# Altium PCB 14V2A.PcbDoc
Units mil, origin at the board's own origin, x right, y up, seen from the top; angles counter-clockwise.
Board outline 3300 x 1500 mil, 2 copper layers (TopLayer, BottomLayer); 52 components, 34 nets, 130 pads, 4 vias.
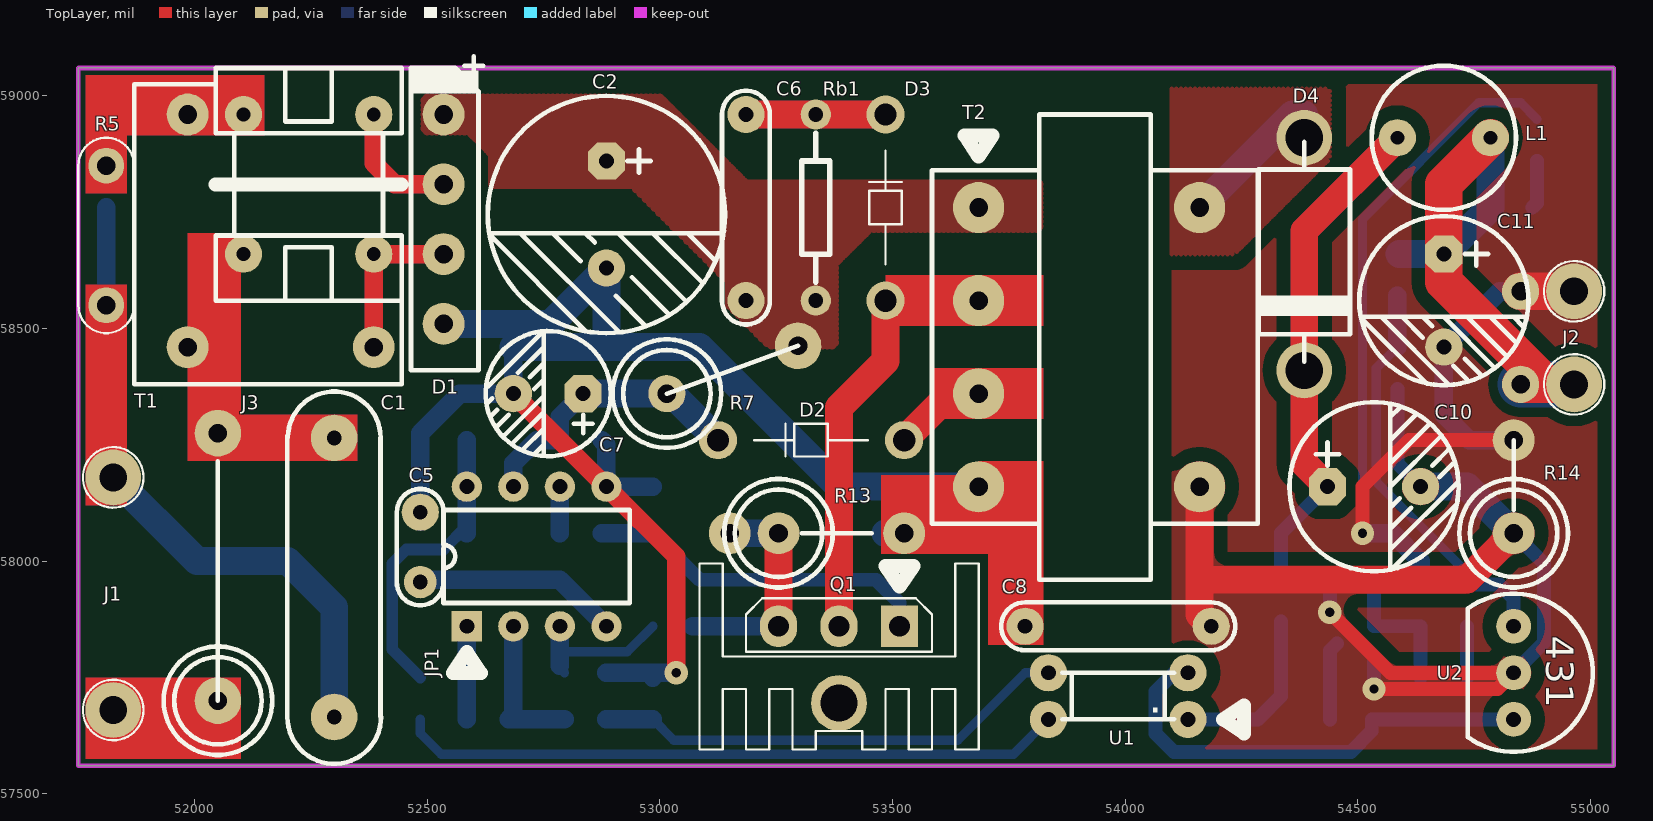
[diagram p0: TopLayer view]
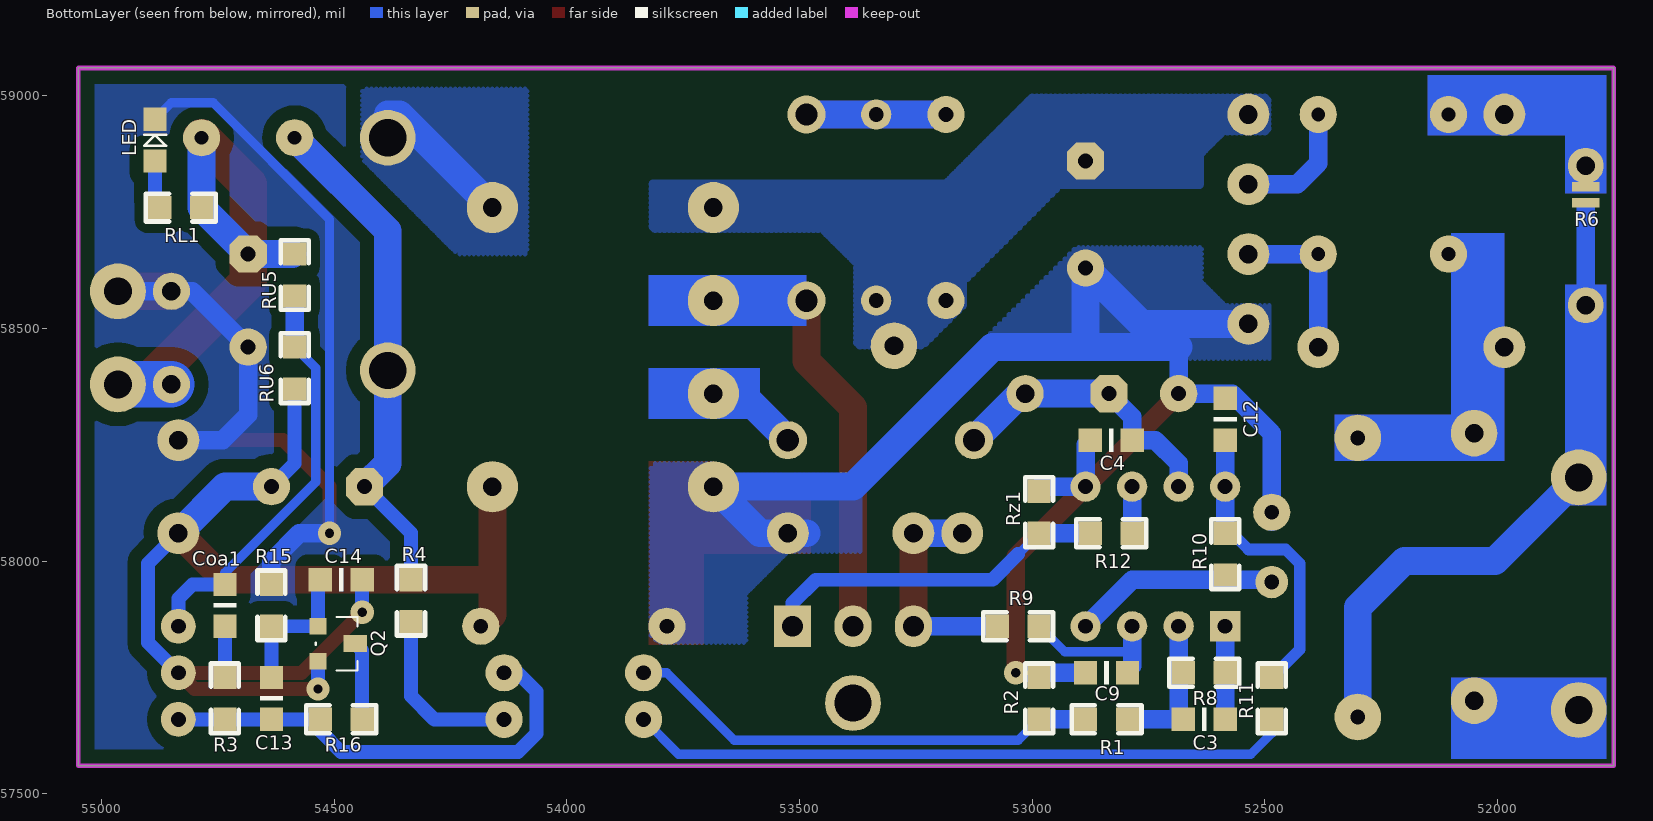
[diagram p1: BottomLayer view, seen from below]

## Layer stack, top to bottom
TopSolder: solder mask 0.4, Solder Resist, Dk 3.5
TopLayer: signal copper 1.4
Dielectric1: dielectric 12.6, FR-4, Dk 4.8
BottomLayer: signal copper 1.4
BottomSolder: solder mask 0.4, Solder Resist, Dk 3.5

## Board outline
51750,57560 55050,57560 55050,59060 51750,59060

## Design rules (kind name [scope] priority, off if disabled: settings)
Clearance Clearance_1 [All vs HasFootprint('XPAD')] p1: gap=2 ignorepadtopadclearanceinfootprint=FALSE except(0: Arc-Hole Track-Hole SMDPad-Hole THPad-Hole Via-Hole Fill-Hole Poly-Hole Region-Hole Text-Hole)
Clearance Clearance_2 [All vs (InPoly)] p2: gap=30 ignorepadtopadclearanceinfootprint=FALSE except(0: Arc-Hole Track-Hole SMDPad-Hole THPad-Hole Via-Hole Fill-Hole Poly-Hole Region-Hole Text-Hole)
Clearance [All] p3: gap=10 ignorepadtopadclearanceinfootprint=FALSE except(0: Arc-Hole Track-Hole SMDPad-Hole THPad-Hole Via-Hole Fill-Hole Poly-Hole Region-Hole Text-Hole)
ComponentClearance [All] p1 off: gap=10 collisioncheckmode=3 verticalgap=10 showdistances=FALSE
FabricationTestPointUsage TestPointUsage [All] p1: valid=0 allowmultiple=FALSE
FabricationTestpoint Testpoint [All] p1: side=3 testpointundercomponent=TRUE minsize=40 maxsize=100 preferedsize=60 minholesize=20 maxholesize=40 preferedholesize=32 testpointgrid=1 allowsidetop=TRUE allowsidebottom=TRUE usegrid=TRUE gridtolerance=0.01
HoleSize [All] p1: absolutevalues=TRUE maxlimit=1000 minlimit=1 maxpercent=80.000 minpercent=20.000
PolygonConnect [All] p1: connectstyle=Direct reliefconductorwidth=10 reliefentries=4 polygonreliefangle="90 Angle" airgapwidth=10
RoutingVias [All] p1: holewidth=28 width=50 viastyle="Through Hole" minholewidth=28 minwidth=50 maxholewidth=28 maxwidth=50
SolderMaskExpansion SolderMaskExpansion_1 [HasFootprint('XPAD')] p1: expansion=0
SolderMaskExpansion [All] p2: expansion=4
Width [All] p1: maxlimit=100 minlimit=5 preferedwidth=100
26 further rules are at their usual default settings.

## Components (designator, comment, footprint, x,y, rotation, side; value= is the part's Value field where it differs from the comment)
C1 "Tụ điện chân cắm 275VAC X2 104" 100N400V 52300,58265 r270 top
C2 "Tụ hóa chân cắm 22uF/400V" 1000U50V 52885,58860 r270 top
C3 "Tụ điện dán 0805 100p" 0805C 52585,57660 r0 bottom
C4 "Tụ điện dán 0805 104" 0805C 52785,58260 r0 bottom
C5 "Tụ điện chân cắm 472" 104NHO 52485,58105 r270 top
C6 "Tụ điện chân cắm 103/2kV" 10N1000V 53185,58960 r90 top
C7 "Tụ hóa chân cắm 47uF/50V" 10U50V 52835,58360 r180 top
C8 "Tụ điện chân cắm 471/2kV" 10N1000V 53785,57860 r180 top
C9 "Tụ điện dán 0805 102" 0805C 52795,57760 r0 bottom
C10 "Tụ hóa chân cắm 1000uF25V" 1000U16V 54435,58160 r0 top
C11 "Tụ hóa chân cắm 470uF/25V" 1000U16V 54685,58660 r270 top
C12 "Tụ điện dán 0805 104" 0805C 52585,58260 r90 bottom
C13 "Tụ điện dán 0805 104" 0805C 54635,57750 r270 bottom
C14 "Tụ điện dán 0805 104" 0805C 54530,57960 r180 bottom
Coa1 "Tụ điện dán 0805 104" 0805C 54735,57860 r90 bottom
D1 "Cầu chỉnh lưu Diode dẹt, chân cắm 2A" CAU2A 52535,58960 r270 top
D2 "Diode xung chân cắm 2A FR207" DIODE1A 53525,58260 r180 top
D3 "Diode xung chân cắm 2A FR207" DIODE1A 53485,58560 r90 top
D4 "Diode xung chân cắm 3A FR307" 1N5408 54385,58960 r270 top
J1 "Jump đực loại thẳng, 2.54mm 2P" JACK2_NAM#1 51825,57980 r180 top
J2 "Jump đực loại thẳng, 2.54mm 2P" JACK2_NAM#2 54965,58380 r180 top
J3 "Cầu chì 1A/275V" R2W_DUNG#1 52050,57700 r270 top
JP1 "IC điều khiển nguồn AC-DC KA3843" DIP8 52585,57860 r90 top
L1 "Cuộn cảm chân cắm lõi trụ 10uH/2A" 330UH 54585,58910 r0 top
LED "LED dán 0805 GREEN" LED0805 54885,58860 r90 bottom
Q1 "Transistor trường MOSFET N, chân cắm TO-220 7N60B" TO220TNB 53485,57860 r180 top
Q2 "Transistor BJT NPN, chân dán SOT-23 2N3904" SOT23S 54535,57785 r180 bottom
R1 "Điện trở dán 0805 10K" 0805DD 52885,57660 r180 bottom
R2 "Điện trở dán 0805 2K2" 0805DD 52985,57660 r90 bottom
R3 "Điện trở dán 0805 470R" 0805DD 54735,57750 r270 bottom
R4 "Điện trở dán 0805 2K2" 0805DD 54335,57870 r90 bottom
R5 "Nhiệt điện trở âm NTC 5D11" CSIP4 51810,58550 r90 top
R6 "OPTION JUMP" XPAD 51810,58770 r90 bottom
R7 "Điện trở chân cắm 2W 220K" R2W_DUNG#2 53015,58360 r200 top
R8 "Điện trở dán 0805 150K" 0805DD 52585,57760 r0 bottom
R9 "Điện trở dán 0805 1K" 0805DD 52985,57860 r0 bottom
R10 "Điện trở dán 0805 3K3" 0805DD 52585,58060 r270 bottom
R11 "Điện trở dán 0805 1K" 0805DD 52485,57750 r270 bottom
R12 "Điện trở dán 0805 22R" 0805DD 52785,58060 r0 bottom
R13 "Điện trở chân cắm 2W 1R0" R2WDUNG#1 53255,58060 r270 top
R14 "Điện trở chân cắm 2W 0R47" R2WDUNG#2 54835,58060 r0 top
R15 "Điện trở dán 0805 10K" 0805DD 54635,57860 r90 bottom
R16 "Điện trở dán 0805 2K2" 0805DD 54440,57660 r0 bottom
Rb1 "Điện trở chân cắm 1W 68K" AXIAL0.4 53335,58960 r270 top
RL1 "Điện trở dán 0805 2K2" 0805DD 54785,58760 r0 bottom (schematic designator Rl1)
RU5 "Điện trở dán 0805 5K6" 0805DD 54585,58660 r270 bottom
RU6 "Điện trở dán 0805 1K" 0805DD 54585,58460 r270 bottom
Rz1 "Điện trở dán 0805 10K" 0805DD 52985,58060 r90 bottom
T1 "Cuộn cảm lọc đầu vào EMI Filter 10-20mH/2A" EMI_FILTER 52105,58660 r0 top
T2 "Biến áp xung Flyback" TRANS6C 53685,58760 r0 top
U1 "Cách ly quang chân cắm TLP521-1" TLP521_1 54135,57660 r0 top
U2 "IC điện áp chuẩn, chân cắm TO92 TL431" TO92_431 54835,57860 r270 top

## Footprints (in the part's own frame and the unit in brackets; to place one, negate y for a bottom-side part, rotate by r counter-clockwise, add the part's x,y. Pads: shape width x height; smd on the part's side, far side on the other; paste and mask are expansions set on the pad)
1N5408 [mil]
  round 120 hole 80: 1(50,0) 2(550,0)
  silkscreen extent 59,-98 531,98, body extent 28,-100 575,98, height 229
10N1000V [mil]
  round 80 hole 32: 1(0,0) 2(-400,0)
  silkscreen extent -451,-51 51,51, body extent -305,-49 -89,49, height 236
10U50V [mil]
  oct 80x80 hole 32: 1(0,0)
  round 80 hole 32: 2(150,0)
  silkscreen extent -60,-134 209,134
100N400V [mil]
  round 100 hole 32: 1(0,0) 2(600,0)
  silkscreen extent -99,-101 700,101, body extent -73,-157 675,158, height 650
104NHO [mil]
  round 80 hole 32: 1(0,0)
  round 70 hole 32: 2(150,0)
  silkscreen extent -50,-50 200,50, body extent -63,-33 213,33, height 288
330UH [mil]
  round 80 hole 30: 1(0,0) 2(200,0)
  silkscreen extent -55,-155 255,155, body extent -98,-196 295,198, height 537
0805C [mil]
  rect 50x50 smd: 1(0,0) 2(90,0)
  silkscreen extent 40,-25 50,25, body extent 6,-25 84,25, height 31
0805DD [mil]
  rect 50x50 smd: 1(0,0) 2(90,0)
  silkscreen extent -30,-30 120,30, body extent 4,-25 82,25, height 31
1000U16V [mil]
  oct 80x80 hole 32: 1(0,0)
  round 80 hole 32: 2(200,0)
  silkscreen extent -82,-182 282,182, body extent -97,-197 297,197, height 473
1000U50V [mil]
  oct 80x80 hole 32: 1(0,0)
  round 80 hole 32: 2(230,0)
  silkscreen extent -140,-255 370,255, body extent -83,-197 311,197, height 473
AXIAL0.4 [mil]
  round 65 hole 32: 1(0,0) 2(400,0)
  silkscreen extent 40,-30 360,30, body extent -12,-69 410,69, height 159
CAU2A [mil]
  round 90 hole 40: 1(0,0) 2(150,0) 3(300,0) 4(450,0)
  silkscreen extent -125,-70 550,85, body extent -62,-89 512,108, height 453
CSIP4 [mil]
  round 77 hole 40: 1(0,0) 2(300,0)
  silkscreen extent -60,-60 360,60, body extent -7,-47 308,47, height 370
DIODE1A [mil]
  round 82 hole 48: 1(0,0) 2(400,0)
  silkscreen extent 78,-35 322,35, body extent -15,-51 415,50, height 120
DIP8 [mil]
  rect 65x65 hole 32: 1(0,0)
  round 65 hole 32: 2(0,-100) 3(0,-200) 4(0,-300) 5(300,-300) 6(300,-200) 7(300,-100) 8(300,0)
  silkscreen extent 50,-350 250,50
EMI_FILTER [mil]
  round 80 hole 30: 1(0,0) 2(0,300) 3(280,0) 4(280,300)
  silkscreen extent -60,-100 340,400
JACK2_NAM#1 [mil]
  round 120 hole 60: 1(0,300) 2(0,-200)
JACK2_NAM#2 [mil]
  round 120 hole 60: 1(0,0) 2(0,-200)
LED0805 [mil]
  rect 50x50 smd: 1(0,0) 2(90,0)
  silkscreen extent 32,-24 56,24, body extent 5,-25 85,24, height 43
R2W_DUNG#1 [mil]
  round 100 hole 40: 1(0,0) 2(-575,0)
  silkscreen extent -515,-117 117,117
R2W_DUNG#2 [mil]
  round 80 hole 40: 1(0,0)
  round 100 hole 40: 2(-300,0)
  silkscreen extent -300,-117 117,117
R2WDUNG#1 [mil]
  round 90 hole 40: 1(0,0) 2(0,270)
  silkscreen extent -117,-117 117,200
R2WDUNG#2 [mil]
  round 90 hole 40: 1(0,0) 2(0,200)
  silkscreen extent -117,-117 117,200
SOT23S [mil]
  rect 36x36 smd: 1(0,75) 3(0,0)
  rect 50x36 smd: 2(80,38)
  silkscreen extent -5,-20 85,95, body extent -9,-21 89,97, height 44
TLP521_1 [mil]
  round 80 hole 32: 1(0,0) 2(0,100) 3(-300,100) 4(-300,0)
  silkscreen extent -270,0 -30,100, body extent -305,-40 5,140, height 138
TO92_431 [mil]
  round 75 hole 32: 1(0,0) 2(100,0) 3(200,0)
  silkscreen extent -70,-99 270,170
TO220TNB [mil]
  round 120 hole 78.74: 0(100,165)
  rect 80x90 hole 45: 1(-30,0)
  oval 80x90 hole 45: 2(100,0) 3(230,0)
  silkscreen extent -200,-135 400,265, body extent -195,-150 395,283, height 1182
TRANS6C [mil]
  round 110 hole 40: 1(0,0) 2(0,-200) 3(0,-400) 4(0,-600) 5(475,-600) 6(475,0)
  silkscreen extent -100,-800 600,200
XPAD [mil]
  rect 20x60 smd: 1(0,0) 2(35,0)

## Part data
C1 C3 C4 C5 C6 C8 C9 C12 C13 C14 Coa1: library part CAP
C2 C7 C10 C11: library part "Cap Pol1", "Polarized Capacitor (Radial)"
D1: library part BRIDGE1, "Diode Bridge"
D2 D3 D4: library part DIODE
J1 J2: library part CON2
J3: library part FUSE2, "Fuse"
JP1: library part "HEADER 4X2"
L1: library part INDUCTORSMALL
LED: library part LED0, "Typical INFRARED GaAs LED"
Q1: library part "MOSFET N"
Q2: library part NPN, "NPN Bipolar Transistor"
R1 R2 R3 R4 R7 R8 R9 R10 R11 R12 R13 R14 R15 R16 Rb1 RL1 RU5 RU6 Rz1: library part "Res Semi", "Semiconductor Resistor"
R5 R6: library part RES3
T1: library part TRANS1
T2: library part TRANS6
U1: library part OPTOISO1, "Optoisolator"
U2: library part TL431, "Adjustable Precision Shunt Regulator"

## Free pads (board coordinates)
  round 90 hole 40: 0(51985,58960) 0(53150,58060) 3(52385,58460) 4(51985,58460)
  round 80 hole 40: 0(54850,58380) 1(54850,58580)

## Via types
v1: diameter 50, hole 20, TopLayer to BottomLayer, 4 vias

## Nets (pads, with @x,y where several pads share a name; then routed paths per layer and width w, separated by ;. In a path a pad name is that pad's centre, name@x,y a point inside that pad or via, vN(x,y) a via of type N, cw(c..) or ccw(c..) an arc to the next point about the centre after c; other vN are vias at no path point)
+320: C2.1 C6.2 D1.1 R7.2 Rb1.2 T2.1
EARTH: C8.2 C10.2 C14.2 Q2.3 R14.1 RU6.2 T2.5 U2.2 | length 2746.1
  TopLayer w30: v1(54440,57890) 54570,57760 U2.2 54800,57725 v1(54535,57725)
  TopLayer w60: T2.5 54160,57960 ; C8.2 54160,57885 54160,57960 ; R14.1 54735,57960 54160,57960
  BottomLayer w30: v1(54440,57890) C14.2 ; v1(54535,57725) Q2.3 ; RU6.2 54585,58210 C10.2 ; U2.2 54900,57825 54900,57995 R14.1
  BottomLayer w60: C10.2 54735,58160 R14.1
EARTH2: C11.2 J2.2 LED.2 pad.1 R14.2 R15.2 | length 2603.9
  TopLayer w30: v1(54510,58060) 54510,58160 54610,58260 R14.2
  TopLayer w80: pad.1 J2.2
  BottomLayer w20: v1(54510,58060) 54510,58735 54760,58985 54850,58985 LED.2
  BottomLayer w30: R15.2 R15.2@54635,57960
  BottomLayer w40: v1(54510,58060) 54575,58060 54635,58000 R15.2@54635,57960 ; R14.2 54740,58260 54685,58315 C11.2 54805,58580 pad.1 J2.2 J2.2@54960,58575
GND: C2.2 C4.2 C5.1 C7.2 C8.1 C9.2 C12.2 D1.4 JP1.5 R2.2 R13.2 Rz1.2 T2.4 | length 3588
  TopLayer w40: C7.2 JP1.5 53035,58010 v1(53035,57760)
  BottomLayer w20: Rz1.2@52975,58160 Rz1.2
  BottomLayer w40: C5.1@52485,58085 52485,58110 52485,58275 52570,58360 C7.2 52685,58460 ; C4.2 52885,58250 JP1.5 52975,58160 Rz1.2@52985,58160 ; C9.2 R2.2@52975,57760 ; R2.2 R2.2@52975,57760 ; v1(53035,57760) R2.2@52975,57760
  BottomLayer w60: D1.4 52765,58510 C2.2 52885,58460 ; 52685,58460 52885,58460 ; R13.2@53485,58060 53520,58060 53585,58060 T2.4 53385,58160 53085,58460 52885,58460
NetC1_1: C1.1 J3.2 pad.4 T1.1
NetC1_2: C1.2 J1.2 R5.1 R6.1 | length 1036
  BottomLayer w40: R5.1 R6.1@51810,58760
  BottomLayer w60: J1.2 52005,58000 52200,58000 52300,57900 C1.2
NetC3_1: C3.1 JP1.1 R8.1 | length 200
  BottomLayer w40: C3.1 R8.1 JP1.1
NetC3_2: C3.2 JP1.2 R1.2 R8.2 | length 438.3
  BottomLayer w20: C3.2 R8.2 R8.2@52685,57770
  BottomLayer w40: JP1.2 52685,57770 52685,57670 C3.2 R1.2
NetC4_1: C4.1 C7.1 D2.2 JP1.7 R7.1 | length 622.8
  BottomLayer w40: JP1.7 52685,58210 52735,58260 C4.1 52785,58310 C7.1
  BottomLayer w60: C7.1 R7.1 53025,58360 D2.2
NetC5_2: C5.2 JP1.4 R10.2 | length 441.4
  BottomLayer w40: C5.2@52485,57960 52785,57960 JP1.4
NetC6_1: C6.1 D3.2 Rb1.1 | length 600
  TopLayer w60: C6.1 Rb1.1 D3.2
  BottomLayer w60: C6.1 Rb1.1 D3.2
NetC9_1: C9.1 JP1.3 R9.1 | length 321.9
  BottomLayer w20: C9.1@52785,57770 C9.1 ; 52785,57805 52930,57805 R9.1
  BottomLayer w40: C9.1@52785,57775 52785,57805 JP1.3
NetC10_1: C10.1 D4.2 L1.1 R4.2 | length 1948.5
  TopLayer w60: C10.1 54385,58210 54385,58360 54385,58710 L1.1
  BottomLayer w30: R4.2 54335,58060 C10.1
  BottomLayer w60: C10.1 54385,58210 54385,58360 54385,58710 L1.1
NetC12_1: C12.1 JP1.8 R10.1 R11.1 | length 663
  BottomLayer w25: R11.1 52425,57810 52425,57995 52455,58025 52535,58025 R10.1@52585,58075
  BottomLayer w40: R10.1 52585,58075 JP1.8 C12.1
NetC13_1: C13.1 C14.1 Q2.1 R15.1 | length 312.1
  BottomLayer w30: C14.1 54535,57955 Q2.1 R15.1 C13.1
NetC13_2: C13.2 R3.2 R16.2 U1.2 U2.3 | length 1006.8
  BottomLayer w30: U1.2 54105,57760 54065,57720 54065,57630 54105,57590 54485,57590 54530,57635 R16.2 C13.2 R3.2 U2.3
NetCoa1_1: Coa1.1 R3.1 | length 110
  BottomLayer w30: R3.1 Coa1.1
NetCoa1_2: Coa1.2 RU5.2 RU6.1 U2.1 | length 891.8
  BottomLayer w20: RU6.1 54540,58415 54540,58170 54735,57975 Coa1.2
  BottomLayer w30: Coa1.2 54805,57950 54835,57920 U2.1
  BottomLayer w40: RU6.1 RU5.2
NetD1_2: D1.2 T1.4 | length 547.3
  TopLayer w40: T1.4 52385,58855 52430,58810 D1.2
  BottomLayer w40: T1.4 52385,58855 52430,58810 D1.2
NetD1_3: D1.3 pad.3 T1.3 | length 700
  TopLayer w40: pad.3 T1.3 D1.3
  BottomLayer w40: pad.3 T1.3 D1.3
NetD2_1: D2.1 T2.3 | length 342.8
  TopLayer w60: D2.1 53625,58360
  BottomLayer w60: D2.1 53625,58360 T2.3
NetD3_1: D3.1 Q1.2 T2.2 | length 941.4
  TopLayer w60: Q1.2 53385,58330 53485,58430 D3.1
  BottomLayer w50: D3.1 T2.2
NetD4_1: D4.1 T2.6 | length 307.8
  BottomLayer w60: T2.6 54360,58960 D4.1@54385,58960
NetJ1_1: J1.1 J3.1
NetJP1_6: JP1.6 R12.1 | length 100
  BottomLayer w40: R12.1 JP1.6
NetLED_1: LED.1 RL1.2 | length 104.1
  BottomLayer w30: RL1.2 54885,58770 LED.1
NetQ1_1: Q1.1 R12.2 Rz1.1 | length 752.1
  BottomLayer w20: Rz1.1 53030,58015
  BottomLayer w30: 53030,58015 53085,57960 53465,57960 53515,57910 Q1.1
  BottomLayer w40: R12.2 Rz1.1
NetQ1_3: pad.0@53150,58060 Q1.3 R9.2 R13.1 | length 490
  TopLayer w60: Q1.3 R13.1
  BottomLayer w40: R9.2@53070,57860 R9.2 Q1.3
  BottomLayer w60: pad.0@53150,58060 R13.1
NetQ2_2: Q2.2 R16.1 | length 169.2
  BottomLayer w30: R16.1 54440,57808 Q2.2
NetR1_1: R1.1 R2.1 U1.3 | length 1028.7
  BottomLayer w20: R2.1 53030,57615 53640,57615 53785,57760 U1.3
  BottomLayer w40: R1.1 R2.1
NetR4_1: R4.1 U1.1 | length 380.7
  BottomLayer w30: U1.1 54285,57660 54335,57710 R4.1
NetR5_2: pad.0@51985,58960 R5.2 R6.2 T1.2
NetR11_2: R11.2 U1.4 | length 1429.7
  BottomLayer w20: R11.2 52485,57630 52530,57585 53760,57585 U1.4
VOUT: C11.1 J2.1 L1.2 pad.0@54850,58380 RL1.1 RU5.1 | length 1279
  TopLayer w80: L1.2 54685,58810 C11.1 54685,58600 J2.1@54905,58380 ; pad.0@54850,58380 J2.1@54905,58380 ; J2.1 J2.1@54905,58380
  BottomLayer w60: RU5.1@54590,58660 C11.1 RL1.1 L1.2
  BottomLayer w100: pad.0@54850,58380 J2.1
pads on no net: Q1.0

## Polygon pours and split planes (outlines as drawn)
NetD4_1 on BottomLayer "BottomLayer-NetT2_6" (hatched 90Degree grid 10 track 10, remove dead copper, pour order 18): 54385,59015 54085,59015 54085,58660 54235,58660 54440,58865 54440,59015
GND on BottomLayer "BottomLayer-GND" (hatched 90Degree grid 10 track 10, remove dead copper, pour order 16): 53820,57825 53820,58210 53685,58210 53660,58185 53370,58185 53370,58020 53525,58020 53615,57930 53615,57825
GND on BottomLayer "BottomLayer-GND 1" (hatched 90Degree grid 10 track 10, remove dead copper, pour order 14): 52490,58550 52585,58550 52635,58600 52635,58675 52905,58675 53108.69,58471.31 53108.69,58435 52490,58435
+320 on BottomLayer "BottomLayer-+320" (hatched 90Degree grid 10 track 20, remove dead copper, pour order 12): 52495,58995 53000,58995 53175,58820 53180,58815 53185,58810 53815,58810 53815,58715 53450,58715 53375,58640 53375,58465 53235,58465 53150,58550 53150,58600 52950,58800 52940,58810 52640,58810 52640,58875 52590,58925 52495,58925
EARTH2 on BottomLayer "Bottom Layer-No Net" (solid, remove dead copper, pour order 20): 55050,59060 55050,57560 54160,57560 54160,59060
NetD4_1 on TopLayer "TopLayer-NetT2_6" (hatched 90Degree grid 10 track 10, remove dead copper, pour order 6): 54385,59015 54100,59015 54100,58660 54235,58660 54440,58865 54440,59015
+320 on TopLayer "TopLayer-+320" (hatched 90Degree grid 10 track 20, remove dead copper, pour order 4): 52495,58995 53000,58995 53175,58820 53180,58815 53185,58810 53815,58810 53815,58715 53450,58715 53375,58640 53375,58465 53235,58465 53150,58550 53150,58600 52950,58800 52940,58810 52640,58810 52640,58875 52590,58925 52495,58925
EARTH2 on TopLayer "Bottom Layer-No Net" (solid, remove dead copper, pour order 22): 55050,59060 55050,57560 54100,57560 54100,59060
EARTH on TopLayer "Bottom Layer-No Net" (solid, remove dead copper, pour order 24): 55050,57560 55050,58225 54100,58225 54100,57560

## Keep-outs
KeepOutLayer:
  the board outline again, w10

## Other copper
TopLayer:
  rectangle net NetD3_1: 53485,58505 53825,58615
  rectangle net NetD2_1: 53585,58305 53825,58415
  rectangle net GND: 53475,58015 53825,58185
  rectangle net GND: 53685,58180 53825,58215
  rectangle net GND: 53705,57820 53825,58020
  rectangle net NetJ1_1: 51765,57575 52100,57750
  rectangle net NetR5_2: 51765,58790 51855,59045
  rectangle net NetR5_2: 51850,58915 52150,59045
  rectangle net NetC1_2: 51765,58120 51855,58595
  rectangle net NetC1_1: 51985,58215 52100,58705
  rectangle net NetC1_1: 52095,58215 52350,58315
BottomLayer:
  rectangle net NetD3_1: 53485,58505 53825,58615
  rectangle net NetD2_1: 53585,58305 53825,58415
  rectangle net NetJ1_1: 51765,57575 52100,57750
  rectangle net NetR5_2: 51765,58790 51855,59045
  rectangle net NetR5_2: 51850,58915 52150,59045
  rectangle net NetC1_2: 51765,58120 51855,58595
  rectangle net NetC1_1: 51985,58215 52100,58705
  rectangle net NetC1_1: 52095,58215 52350,58315

## Silkscreen, mask and mechanical layers (free items; w line width, h text height)
TopOverlay:
  circle w5: c51825,58180 r65.19
  circle w5: c51825,57680 r65.19
  circle w5: c54965,58580 r65
  circle w5: c54965,58380 r65
  rectangle: 52465,59005 52610,59055
  lines w10: 52045,59025 51870,59025 51870,58380 52445,58380 52445,58560 ; 52630,58340 52640,58350 ; 52630,58375 52745,58490 ; 52635,58310 52650,58325 ; 52635,58700 52840,58495 ; 52635,58705 53133.52,58705 ; 52650,58290 52675,58315 ; 52665,58270 52750,58355 ; 52685,58255 52750,58320 ; 52695,58405 52750,58460 ; 52700,58705 52910,58495 ; 52705,58240 52750,58285 ; 52720,58395 52750,58425 ; 52730,58230 52750,58250 ; 52730,58370 52750,58390 ; 52750,58230 52750,58490 ; 52770,58705 52830,58645 ; 52840,58705 52860,58685 ; 52905,58570 52970,58505 ; 52910,58705 53055,58560 ; 52940,58610 53020,58530 ; 52985,58705 53090,58600 ; 53060,58705 53120,58645 ; 54510,58520 54645,58385 ; 54510,58525 54860,58525 ; 54550,58525 54695,58380 ; 54570,57985 54570,58335 ; 54570,58025 54715,58170 ; 54570,58070 54615,58115 ; 54570,58115 54590,58135 ; 54570,58160 54680,58270 ; 54570,58210 54655,58295 ; 54570,58260 54625,58315 ; 54570,58310 54590,58330 ; 54575,57985 54710,58120 ; 54595,58525 54640,58480 ; 54640,58525 54660,58505 ; 54660,58205 54695,58240 ; 54675,58180 54705,58210 ; 54685,58525 54795,58415 ; 54705,58420 54735,58390 ; 54730,58435 54765,58400 ; 54735,58525 54820,58440 ; 54785,58525 54840,58470 ; 54835,58525 54855,58505
  lines w30: 52555,57760 52615,57760 52585,57805 52555,57760 ; 53485,57990 53515,57945 53545,57990 53485,57990 ; 53655,58915 53685,58870 53715,58915 53655,58915 ; 54210,57660 54255,57690 54255,57630 54210,57660

## Text inside footprints (layer, text, board x,y; h text height)
U2: TopOverlay "431" at 54905,57840 h60 r270